# Altium PCB version_2.PcbDoc
Units mil, origin at the board's own origin, x right, y up, seen from the top; angles counter-clockwise.
Board outline 3930.36 x 2285 mil, 2 copper layers (Top Layer, Bottom Layer); 63 components, 60 nets, 290 pads, 52 vias.
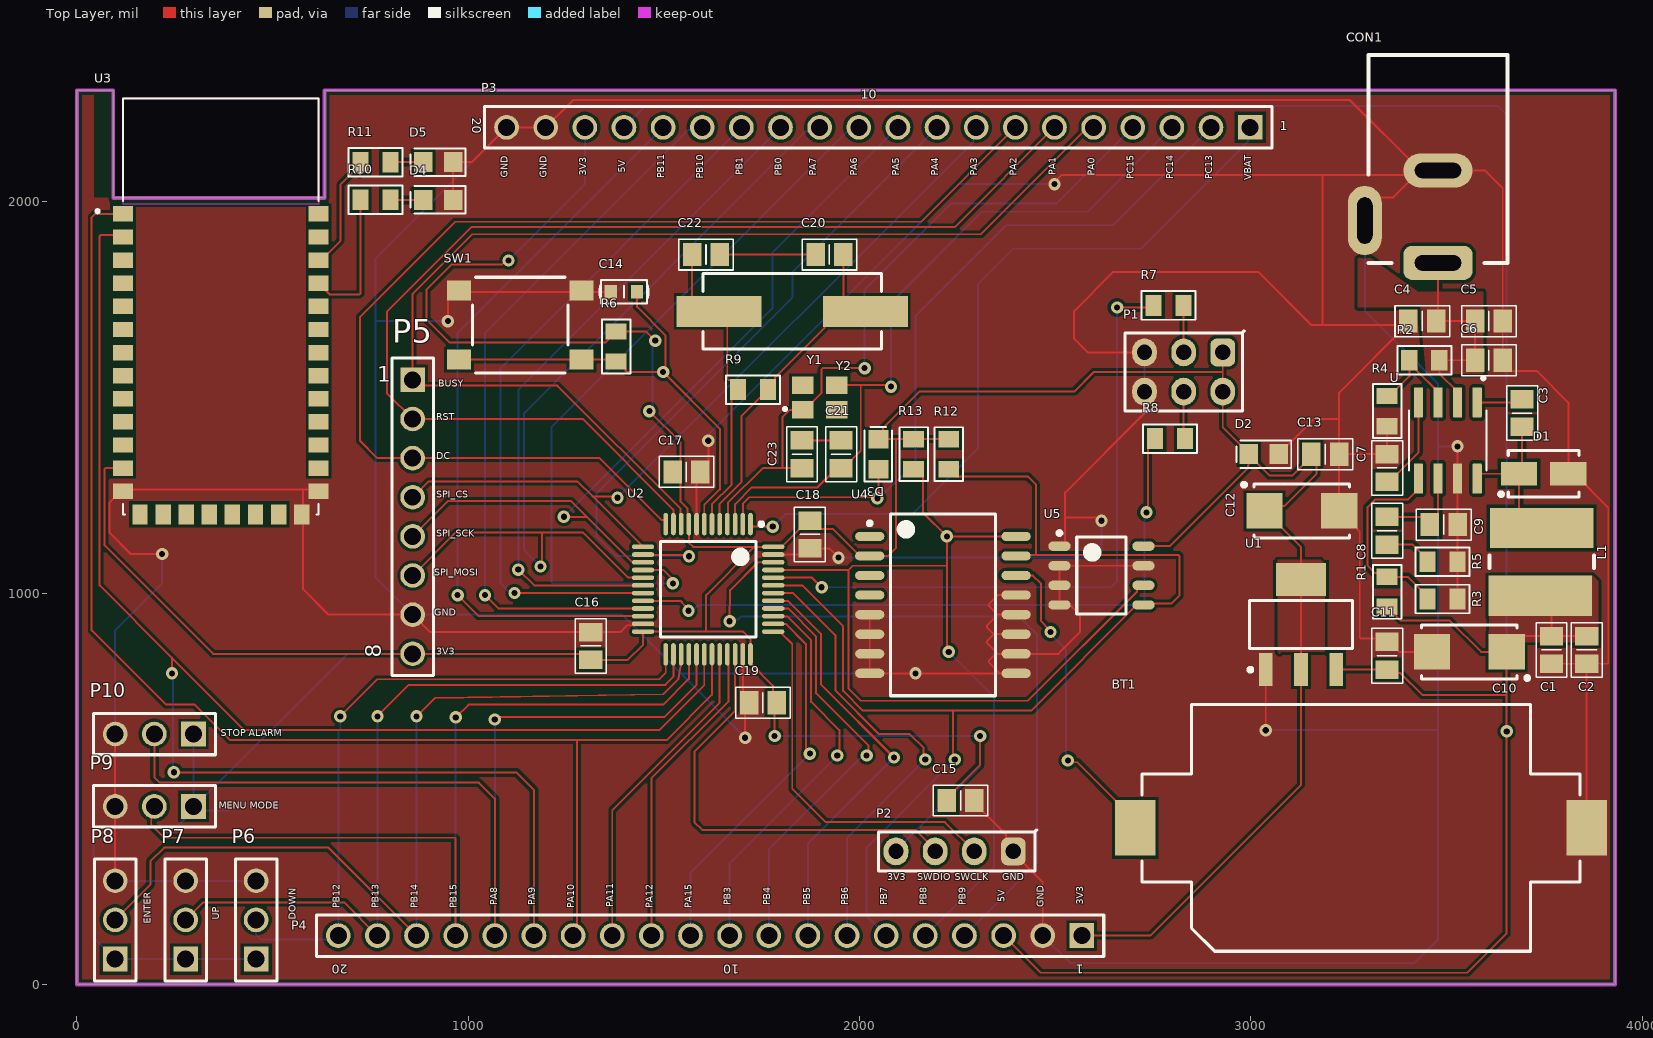
[diagram p0: Top Layer view]
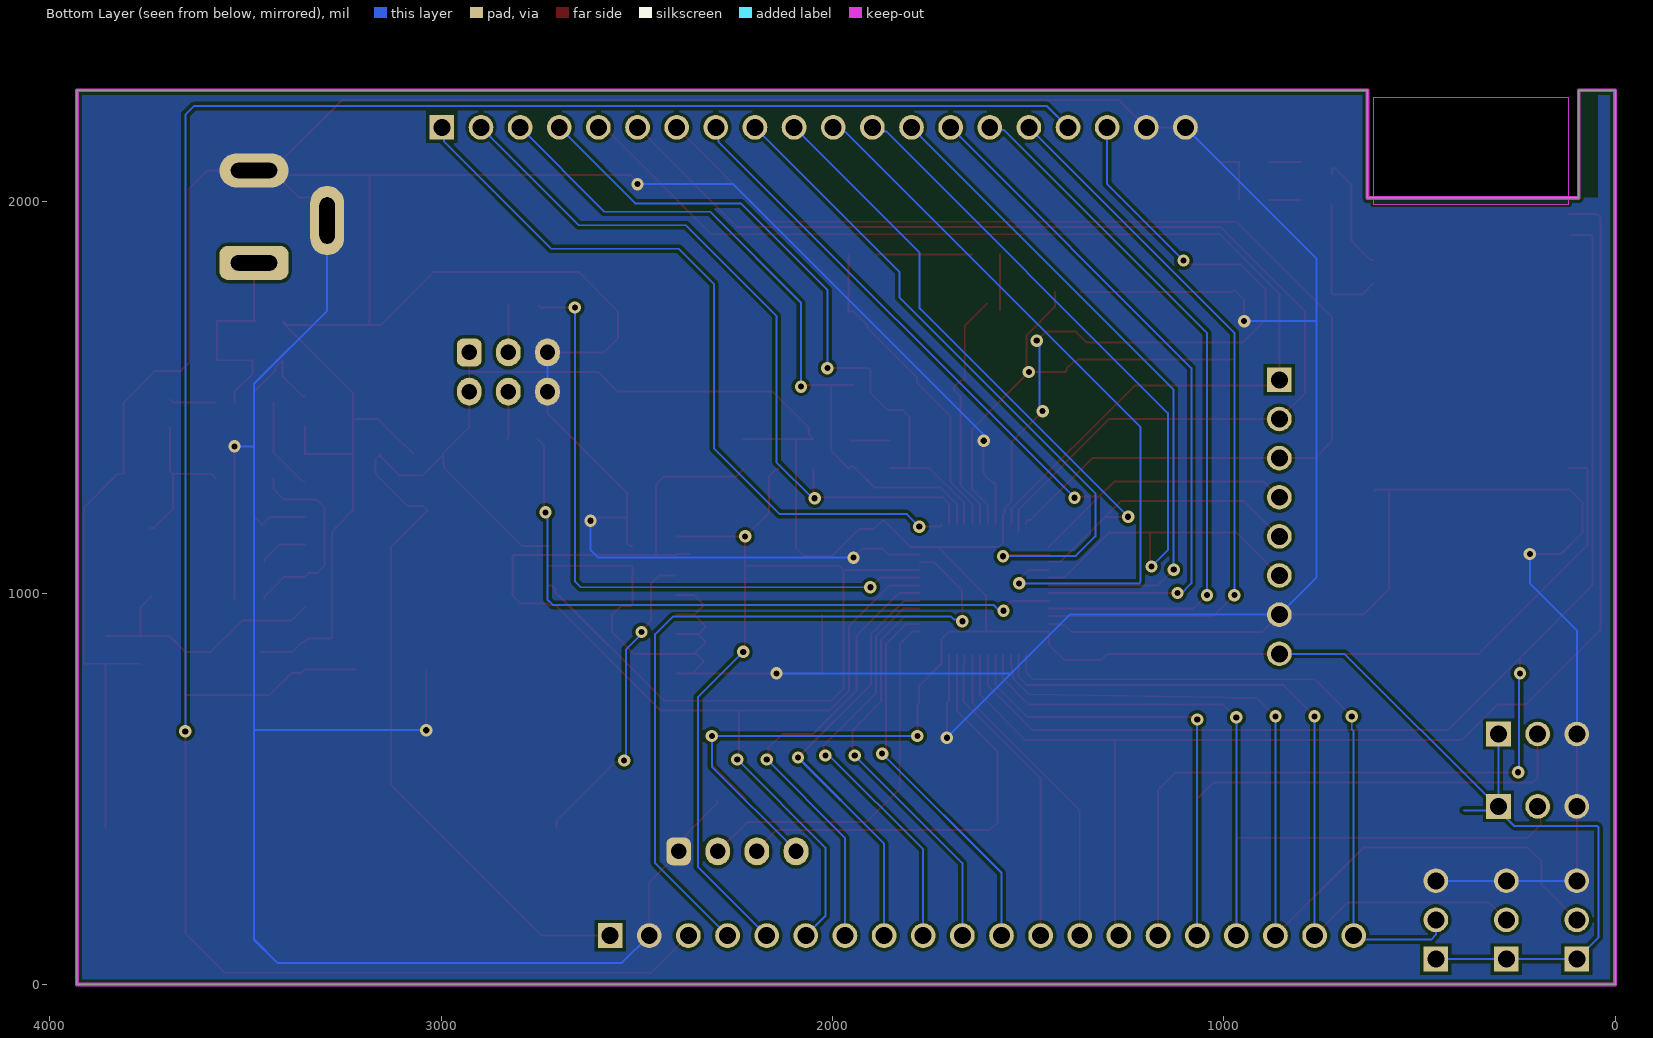
[diagram p1: Bottom Layer view, seen from below]

## Layer stack, top to bottom
Top Solder: solder mask 0.4, Solder Resist, Dk 3.5
Top Layer: signal copper 1.4
Dielectric 1: dielectric 12.6, FR-4, Dk 4.8
Bottom Layer: signal copper 1.4
Bottom Solder: solder mask 0.4, Solder Resist, Dk 3.5

## Board outline
0,0 0,2285 92.86,2285 92.86,2010 632.86,2010 632.86,2285 3930.36,2285 3930.36,0

## Design rules (kind name [scope] priority, off if disabled: settings)
Clearance [All] p1: gap=8 ignorepadtopadclearanceinfootprint=TRUE
PolygonConnect [All] p1: connectstyle=Direct reliefconductorwidth=10 reliefentries=4 polygonreliefangle="90 Angle" airgapwidth=10
RoutingVias [All] p1: holewidth=15.75 width=31.5 viastyle="Through Hole" minholewidth=15.75 minwidth=31.5 maxholewidth=15.75 maxwidth=31.5
SolderMaskExpansion [All] p1: expansion=4 istentingtop=FALSE
Width [All] p1: maxlimit=50 minlimit=5 preferedwidth=10
30 further rules are at their usual default settings.

## Classes and differential pairs
component class 06_I2C_DS3231: BT1 R12 R13 U4 U5
component class 05_Uart_Bluetooth: D4 D5 P5 P6 P7 P8 P9 P10 R10 R11 U3
component class 04: C14 C15 C16 C17 C18 C19 C20 C21 C22 C23 D2 D3 P1 P2 P3 P4 R6 R7 R8 R9 SW1 U2 Y1 Y2
component class 03_Power_supply: C1 C2 C3 C4 C5 C6 C7 C8 C9 C10 C11 C12 C13 CON1 D1 L1 R1 R2 R3 R4 R5 U U1

## Components (designator, comment, footprint, x,y, rotation, side; value= is the part's Value field where it differs from the comment)
BT1 "79527141" 79527141 3281.09,400 r180 top
C1 "47uF" "C 0805" 3767.86,855 r90 top
C2 "47uF" "C 0805" 3857.86,855 r90 top
C3 "0.1uF" "C 0805" 3692.86,1460 r90 top
C4 "10uf" "C 0805" 3437.86,1695 r0 top
C5 "10uf" "C 0805" 3607.86,1695 r180 top
C6 "0.01uF" "C 0805" 3607.86,1595 r180 top
C7 "0.01uF" "C 0805" 3347.86,1320 r270 top
C8 "1000pF" "C 0805" 3347.86,1159.57 r90 top
C9 "47pF" "C 0805" 3492.43,1175 r180 top
C10 "22uF" "C SMD TAN 2312 (C)" 3557.86,850 r180 top
C11 "100nF" "C 0805" 3347.86,840 r270 top
C12 "22uF" "C SMD TAN 2312 (C)" 3129.83,1210 r0 top
C13 "100nF" "C 0805" 3189.87,1355 r180 top
C14 "C" "C 0603" 1397.86,1770 r180 top
C15 "104" "C 0805" 2257.86,470 r0 top
C16 "104" "C 0805" 1312.86,865 r270 top
C17 "104" "C 0805" 1557.43,1310 r180 top
C18 "104" "C 0805" 1872.86,1150 r90 top
C19 "104" "C 0805" 1752.86,720 r0 top
C20 "20p" "C 0805" 1922.86,1865 r180 top
C21 "20p" "C 0805" 1952.86,1355 r90 top
C22 "20p" "C 0805" 1607.43,1865 r0 top
C23 "20p" "C 0805" 1852.86,1355 r90 top
CON1 "CON DC PWR" CONN/DC/PWR/5.0MM 3477.86,1843.78 r270 top
D1 "SS54F" "DO-214AC (SMA)" 3747.86,1305 r180 top
D2 "Led" "Led 0805" 3032.86,1355 r0 top
D3 "Led" "Led 0805" 2047.86,1355 r270 top
D4 "Led" "Led 0805" 922.86,2005 r0 top
D5 "Led" "Led 0805" 922.86,2101.22 r0 top
L1 "10uh" "Inductor SMD CDRH3D67" 3742.86,1080 r270 top
P1 "Header 3X2" HDR/Header/6/DL 2827.86,1565 r180 top
P2 "Header 4" HDR/Header/4 2242.86,340 r180 top
P3 "3A, 250 V (AC)" 61302011121 2047.86,2190 r180 top
P4 "3A, 250 V (AC)" 61302011121 1617.86,125 r180 top
P5 "3A, 250 V (AC)" 61300811121 857.86,1195 r270 top
P6 "3A, 250 V (AC)" 61300311121 457.86,165 r90 top
P7 "3A, 250 V (AC)" 61300311121 277.86,165 r90 top
P8 "3A, 250 V (AC)" 61300311121 97.86,165 r90 top
P9 "3A, 250 V (AC)" 61300311121 197.86,455 r180 top
P10 "3A, 250 V (AC)" 61300311121 197.86,640 r180 top
R1 "8.2k" "R 0805" 3347.86,1003.39 r270 top
R2 "100k" "R 0805" 3442.86,1595 r0 top
R3 "1.6k" "R 0805" 3489.48,985 r180 top
R4 "20k" "R 0805" 3347.86,1465 r90 top
R5 "30k" "R 0805" 3489.48,1080 r180 top
R6 "10k" "R 0805" 1377.86,1630 r270 top
R7 "100k" "R 0805" 2789.48,1735 r180 top
R8 "R" "R 0805" 2792.86,1395 r0 top
R9 "R" "R 0805" 1727.86,1520 r0 top
R10 "470" "R 0805" 762.86,2005 r180 top
R11 "470" "R 0805" 762.86,2101.22 r180 top
R12 "10k" "R 0805" 2227.86,1355 r270 top
R13 "4.7k" "R 0805" 2137.86,1355 r270 top
SW1 "430152043826" WS-TASV_L6W6H4.3_4301x20438x6 1132.86,1685 r0 top
U "TPS54231D" SOIC127P599X175-8N 3502.86,1390 r270 top
U1 "AMS1117-3.3V, 1A" "AMS1117-3.3V SOT223" 3127.86,919.92 r90 top
U2 "STM32F103C8T6" STM32F103C8T6 1612.86,1010 r270 top
U3 "HC-05" XCVR_HC-05 367.86,1720 r0 top
U4 "DS3231SN" DS3231SN-16SOIC 2212.86,970 r0 top
U5 "AT24C512C-SSHD-T" M24M01-RMN6TP 2617.86,1045 r0 top
Y1 "32MHz" WE-XTAL_CFPX-180 1897.86,1500 r0 top
Y2 "8MHz" WE-XTAL_HC49/4HSMX 1827.86,1720 r0 top

## Footprints (in the part's own frame and the unit in brackets; to place one, negate y for a bottom-side part, rotate by r counter-clockwise, add the part's x,y. Pads: shape width x height; smd on the part's side, far side on the other; paste and mask are expansions set on the pad)
79527141 [mm] "Battery Holder"
  rect 2.6x3.6 smd: 1(14.65,0) 2(-14.65,0)
  silkscreen extent -14.2,-8 14.2,8, body extent -15.95,-8 15.95,8, height 5.66
61300311121 [mm] "Pin Header, pitch 2.54 mm, THT, Vertical, single row, 3p"
  rect 1.6x1.6 hole 1.1: 1(-2.54,0)
  round 1.6 hole 1.1: 2(0,0) 3(2.54,0)
  silkscreen extent -3.96,-1.35 3.96,1.35, body extent -3.81,-1.27 3.81,1.27, height 8.57
61300811121 [mm] "Pin Header, pitch 2.54 mm, THT, Vertical, single row, 8p"
  rect 1.6x1.6 hole 1.1: 1(-8.89,0)
  round 1.6 hole 1.1: 2(-6.35,0) 3(-3.81,0) 4(-1.27,0) 5(1.27,0) 6(3.81,0) 7(6.35,0) 8(8.89,0)
  silkscreen extent -10.31,-1.35 10.31,1.35, body extent -10.16,-1.27 10.16,1.27, height 8.57
61302011121 [mm] "Pin Header, pitch 2.54 mm, THT, Vertical, single row, 20p"
  rect 1.6x1.6 hole 1.1: 1(-24.13,0)
  round 1.6 hole 1.1: 2(-21.59,0) 3(-19.05,0) 4(-16.51,0) 5(-13.97,0) 6(-11.43,0) 7(-8.89,0) 8(-6.35,0) 9(-3.81,0) 10(-1.27,0) 11(1.27,0) 12(3.81,0) 13(6.35,0) 14(8.89,0) 15(11.43,0) 16(13.97,0) 17(16.51,0) 18(19.05,0) 19(21.59,0) 20(24.13,0)
  silkscreen extent -25.55,-1.35 25.55,1.35, body extent -25.4,-1.27 25.4,1.27, height 8.57
"AMS1117-3.3V SOT223" [mm] "SOT223, 4-Leads, Body 6.51x7.00mm, Pitch 2.29mm"
  rect 2.15x0.9 smd: 1(-2.93,2.29) 2(-2.93,0) 3(-2.93,-2.29)
  rect 2.15x3.25 smd: 4(2.93,0)
  silkscreen extent -3.05,-3.35 1.55,3.41, body extent -3.5,-3.35 3.5,3.35, height 1.8
"C 0603" [mm] "Chip Capacitor, 2-Leads, Body 1.6x0.8mm, IPC Medium Density"
  rect 0.8x0.85 smd: 1(-0.85,0) 2(0.85,0)
  silkscreen extent -1.6,-0.75 1.6,0.75, body extent -0.8,-0.43 0.8,0.43, height 0.81
"C 0805" [mm] "Chip Capacitor, 2-Leads, Body 2.0x1.3mm, IPC Medium Density"
  rect 1.2x1.5 smd: 1(-0.9,0) 2(0.9,0)
  silkscreen extent -1.78,-1 1.78,1, body extent -1,-0.64 1,0.61, height 0.6
"C SMD TAN 2312 (C)" [mm] "Molded Capacitor, 2-Leads, Body 6.0x3.2mm, IPC Medium Density"
  rect 2.35x2.3 smd: 1(-2.425,0) 2(2.425,0)
  silkscreen extent -3.88,-1.75 3.1,1.82, body extent -3.09,-1.58 3.09,1.63, height 2.68
CONN/DC/PWR/5.0MM [mm]
  rrect50% 2.2x4.5 hole 1 slot 3 at 90 deg: 1(0,0)
  oval 2.2x4.5 hole 1 slot 3 at 90 deg: 2(-6,0)
  oval 4.5x2.2 hole 1 slot 3 at 0 deg: 3(-2.75,-4.75)
  silkscreen extent -13.5,-4.5 0,4.5, body extent -13.58,-5 0.25,4.5, height 11.02
"DO-214AC (SMA)" [mm] "Molded Diode, 2-Leads, Body 4.3x2.7mm, IPC Medium Density"
  rect 2.35x1.55 smd: 1(-1.6,0) 2(1.6,0)
  silkscreen extent -2.3,-1.5 2.89,1.5, body extent -2.6,-1.3 2.6,1.3, height 2.4
DS3231SN-16SOIC [mm] "SOIC, 16-Leads, Body 11.55x7.50mm, Pitch 1.27mm, IPC Medium Density"
  oval 1.9x0.6 smd: 1(-4.75,4.445) 2(-4.75,3.175) 3(-4.75,1.905) 4(-4.75,0.635) 5(-4.75,-0.635) 6(-4.75,-1.905) 7(-4.75,-3.175) 8(-4.75,-4.445) 9(4.75,-4.445) 10(4.75,-3.175) 11(4.75,-1.905) 12(4.75,-0.635) 13(4.75,0.635) 14(4.75,1.905) 15(4.75,3.175) 16(4.75,4.445)
  silkscreen extent -4.87,-5.9 3.4,5.9, body extent -5.16,-5.9 5.16,5.9, height 2.65
HDR/Header/4 [mm]
  rrect50% 1.6x1.8 hole 1: 1(-3.81,0)
  oval 1.6x1.8 hole 1: 2(-1.27,0) 3(1.27,0) 4(3.81,0)
  silkscreen extent -5.33,-1.4 4.95,1.27, body extent -5.08,-1.27 5.08,1.27, height 8.89
HDR/Header/6/DL [mm]
  rrect50% 1.6x1.8 hole 1: 1(-2.54,-1.27)
  oval 1.6x1.8 hole 1: 2(-2.54,1.27) 3(0,-1.27) 4(0,1.27) 5(2.54,-1.27) 6(2.54,1.27)
  silkscreen extent -3.94,-2.67 3.81,2.54, body extent -3.81,-2.54 3.81,2.54, height 8.89
"Inductor SMD CDRH3D67" [mm] "Precision Wire Wound Inductor, 2-Leads, Body 10.0x8.0mm, IPC Low Density"
  rect 2.6x6.7 smd: 1(-2.2,0) 2(2.2,-0.1)
  silkscreen extent -0.4,-3.4 0.4,3.4, body extent -3.35,-3.35 3.35,3.35, height 2.9
"Led 0805" [mm] "Led SMD 0805"
  rect 1.2x1.3 smd: 1(-0.975,0) 2(0.975,0)
  silkscreen extent -1.78,-0.89 1.78,0.89, body extent -1.01,-0.64 1.01,0.61, height 1.1
M24M01-RMN6TP [mm] "SOIC, 8-Leads, Body 4.90x3.90mm, Pitch 1.27mm, IPC Medium Density"
  oval 1.45x0.6 smd: 1(-2.725,1.905) 2(-2.725,0.635) 3(-2.725,-0.635) 4(-2.725,-1.905) 5(2.725,-1.905) 6(2.725,-0.635) 7(2.725,0.635) 8(2.725,1.905)
  silkscreen extent -2.85,-2.5 1.6,2.88, body extent -3,-2.5 3,2.5, height 1.25
"R 0805" [mm] "Chip Resistor, 2-Leads, Body 2.0x1.3mm, IPC Medium Density"
  rect 1.05x1.35 smd: 1(-0.975,0) 2(0.975,0)
  silkscreen extent -1.75,-0.92 1.75,0.92, body extent -1,-0.61 1,0.59, height 0.5
SOIC127P599X175-8N [mm]
  rrect25% 1.97x0.6 smd: 1(-2.47,1.905) 2(-2.47,0.635) 3(-2.47,-0.635) 4(-2.47,-1.905) 5(2.47,-1.905) 6(2.47,-0.635) 7(2.47,0.635) 8(2.47,1.905)
  silkscreen extent -4.14,-2.52 1.95,2.52
STM32F103C8T6 [mm] "TSQFP, 48-Leads, Body 7.00x7.00mm, Pitch 0.50mm, IPC Medium Density"
  oval 1.45x0.3 smd: 1(-4.225,2.75) 2(-4.225,2.25) 3(-4.225,1.75) 4(-4.225,1.25) 5(-4.225,0.75) 6(-4.225,0.25) 7(-4.225,-0.25) 8(-4.225,-0.75) 9(-4.225,-1.25) 10(-4.225,-1.75) 11(-4.225,-2.25) 12(-4.225,-2.75) 25(4.225,-2.75) 26(4.225,-2.25) 27(4.225,-1.75) 28(4.225,-1.25) 29(4.225,-0.75) 30(4.225,-0.25) 31(4.225,0.25) 32(4.225,0.75) 33(4.225,1.25) 34(4.225,1.75) 35(4.225,2.25) 36(4.225,2.75)
  oval 0.3x1.45 smd: 13(-2.75,-4.225) 14(-2.25,-4.225) 15(-1.75,-4.225) 16(-1.25,-4.225) 17(-0.75,-4.225) 18(-0.25,-4.225) 19(0.25,-4.225) 20(0.75,-4.225) 21(1.25,-4.225) 22(1.75,-4.225) 23(2.25,-4.225) 24(2.75,-4.225) 37(2.75,4.225) 38(2.25,4.225) 39(1.75,4.225) 40(1.25,4.225) 41(0.75,4.225) 42(0.25,4.225) 43(-0.25,4.225) 44(-0.75,4.225) 45(-1.25,4.225) 46(-1.75,4.225) 47(-2.25,4.225) 48(-2.75,4.225)
  silkscreen extent -4.35,-3.1 3.1,3.58, body extent -4.5,-4.5 4.5,4.5, height 1.6
WE-XTAL_CFPX-180 [mm] "Quartz Crystal, size CFPX-180, body 3.4x2.7mm"
  rect 1.4x1.15 smd: 1(-1.1,-0.8) 2(1.1,-0.8) 3(1.1,0.8) 4(-1.1,0.8)
  silkscreen extent -2.35,-0.85 -2.15,-0.65, body extent -1.7,-1.35 1.7,1.35, height 0.65
WE-XTAL_HC49/4HSMX [mm] "Quartz Crystal, size HC49/4HSMX, body 11.4x4.9mm"
  rect 5.5x2 smd: 1(-4.75,0) 2(4.75,0)
  silkscreen extent -5.8,-2.45 5.8,2.45, body extent -6.7,-2.45 6.7,2.45, height 4.3
WS-TASV_L6W6H4.3_4301x20438x6 [mm] "SMD Tact Switch, body 6x6mm"
  rect 1.55x1.3 smd: A1(-3.975,2.25) A2(3.975,2.25) B1(-3.975,-2.25) B2(3.975,-2.25)
  silkscreen extent -3.1,-3.1 3.1,3.1, body extent -4.5,-3.1 4.5,3.1, height 4.3
XCVR_HC-05 [mm]
  rect 1.3x1 smd: 1(-6.35,6.325) 2(-6.35,4.825) 3(-6.35,3.325) 4(-6.35,1.825) 5(-6.35,0.325) 6(-6.35,-1.175) 7(-6.35,-2.675) 8(-6.35,-4.175) 9(-6.35,-5.675) 10(-6.35,-7.175) 11(-6.35,-8.675) 12(-6.35,-10.175) 13(-6.35,-11.675) 22(6.35,-11.675) 23(6.35,-10.175) 24(6.35,-8.675) 25(6.35,-7.175) 26(6.35,-5.675) 27(6.35,-4.175) 28(6.35,-2.675) 29(6.35,-1.175) 30(6.35,0.325) 31(6.35,1.825) 32(6.35,3.325) 33(6.35,4.825) 34(6.35,6.325)
  rect 1x1.3 smd: 14(-5.25,-13.175) 15(-3.75,-13.175) 16(-2.25,-13.175) 17(-0.75,-13.175) 18(0.75,-13.175) 19(2.25,-13.175) 20(3.75,-13.175) 21(5.25,-13.175)
  Keep-Out Layer region: 6.35,6.95 -6.35,6.95 -6.35,13.85 6.35,13.85
  Keep-Out Layer region: 6.35,6.95 -6.35,6.95 -6.35,13.85 6.35,13.85
  silkscreen extent -8.1,-13.18 6.35,13.82

## Part data
BT1: "WA-BCPH Battery Holder, SMT, battery type 2032", Manufacturer="Wurth Elektronik", Operating Temperature Max=105°C, Operating Temperature Min=-40°C, Battery Type=2032, Category="Battery Holders", ComponentLink1Description="Website Link", ComponentLink1URL=https://www.we-online.com/redexpert/article/79527141?ad, ComponentLink2Description="Datasheet Link", ComponentLink2URL=https://www.we-online.com/redexpert/spec/79527141?ad, Manufacturer Part Number=79527141, Match Code=WA-BCPH, Mount="Surface Mount", Packaging="Tape and Reel"
C1 C2 C3 C4 C5 C6 C7 C8 C9 C11 C13 C14 C15 C16 C17 C18 C19 C20 C21 C22 C23: library part "Capacitor NP", "Capacitor non-pol"
C10 C12: library part Capacitor, "Capacitor pol"
CON1: "DC input connector"
D1: library part "Diode Schottky", "Schottky Diode"
D2 D3 D4 D5: "Typical LED"
L1: library part Inductor, "Inductor"
P1: "Header, 3-Pin, Dual row"
P2: "Header, 4-Pin"
P3 P4: library part 61302011121, "WR-PHD Pin Header, THT, pitch 2.54mm, Single Row, Vertical, 20p", Contact Resistance=20mOhm, LCSC Part #=N/A, Manufacturer="Wurth Elektronik", Operating Temperature Max="+ 85 C", Operating Temperature Min="- 25 C", Rated Current=3A, Supplier 1 Part Number=710-61302011121, Withstanding Voltage=500VAC, Working Voltage=250VAC, ComponentLink1Description=Datasheet, ComponentLink1URL=https://www.we-online.com/catalog/datasheet/61302011121.pdf, Gender="Pin Header", Manufacturer Part Number=61302011121, Mount=THT, Orientation=Vertical, Packaging=Bag, Pin Number=20, Pitch=2.54mm, Published Date="May 2020", Row Number=Single, Supplier 1=Mouser, Supplier 1 URL=https://www.mouser.vn/ProductDetail/Wurth-Elektronik/61302011121?qs=PhR8RmCirEbj%2FFsnpbhNaw%3D%3D, Supplier 2=Digi-Key, Supplier 2 Part Number=N/A, Supplier 2 URL=N/A, Supplier 3=thegioiic, Supplier 3 Part Number=N/A, Supplier 3 URL=N/A
P5: library part 61300811121, "WR-PHD Pin Header, THT, pitch 2.54mm, Single Row, Vertical, 8p", Contact Resistance=20mOhm, LCSC Part #=N/A, Manufacturer="Wurth Elektronik", Operating Temperature Max="+ 85 C", Operating Temperature Min="- 25 C", Rated Current=3A, Supplier 1 Part Number=710-61300811121, Withstanding Voltage=500VAC, Working Voltage=250VAC, ComponentLink1Description=Datasheet, ComponentLink1URL=https://www.we-online.com/catalog/datasheet/61300811121.pdf, Gender="Pin Header", Manufacturer Part Number=61300811121, Mount=THT, Orientation=Vertical, Packaging=Bag, Pin Number=8, Pitch=2.54mm, Published Date="May 2020", Row Number=Single, Supplier 1=Mouser, Supplier 1 URL=https://www.mouser.vn/ProductDetail/Wurth-Elektronik/61300811121?qs=PhR8RmCirEZRdx%252BVlEmRRA%3D%3D, Supplier 2=Digi-Key, Supplier 2 Part Number=N/A, Supplier 2 URL=N/A, Supplier 3=thegioiic, Supplier 3 Part Number=N/A, Supplier 3 URL=N/A
P6 P7 P8 P9 P10: library part 61300311121, "WR-PHD Pin Header, THT, pitch 2.54mm, Single Row, Vertical, 3p", Contact Resistance=20mOhm, LCSC Part #=C2937625, Manufacturer="Wurth Elektronik", Operating Temperature Max="+ 85 C", Operating Temperature Min="- 25 C", Rated Current=3A, Supplier 1 Part Number=710-61300311121, Supplier 2 Part Number=N/A, Withstanding Voltage=500VAC, Working Voltage=250VAC, ComponentLink1Description=Datasheet, ComponentLink1URL=https://www.we-online.com/catalog/datasheet/61300311121.pdf, Gender="Pin Header", Manufacturer Part Number=61300311121, Mount=THT, Orientation=Vertical, Packaging=Bag, Pin Number=3, Pitch=2.54mm, Published Date="May 2020", Row Number=Single, Supplier 1=Mouser, Supplier 1 URL=https://www.mouser.vn/ProductDetail/Wurth-Elektronik/61300311121?qs=PhR8RmCirEYxRWFJzNKsUw%3D%3D, Supplier 2=Digi-Key, Supplier 2 URL=N/A, Supplier 3=thegioiic, Supplier 3 Part Number=N/A, Supplier 3 URL=N/A
R1 R2 R3 R4 R5 R6 R7 R8 R9 R10 R11 R12 R13: library part Resistor, "Resistor"
SW1: "WS-TASV SMT Tact Switch, L6 x W6 x H4.3mm, 260g, SPST-NO, 12V, 50mA", LCSC Part #=N/A, Manufacturer="Wurth Elektronik", Operating Temperature Max=85°C, Operating Temperature Min=-40°C, Package / Case=0805, Rated Current=50mA, Rated Voltage=12VDC, Supplier 1 Part Number=710-430152043826, Supplier 2 Part Number=732-6991-2-ND, Supplier 3 Part Number=OEM, Category="Tact Switches", Circuit=SPST-NO, ComponentLink1Description=Datasheet, ComponentLink1URL=https://www.we-online.com/redexpert/spec/430152043826?ad, Contact Material="Stainless Steel", Height=4.3mm, Length=6mm, Manufacturer Part Number=430152043826, Match Code=WS-TASV, Mount="Surface Mount", Operation Force=260g, Packaging="Tape and Reel", Supplier 1=Mouser, Supplier 1 URL=https://www.mouser.vn/ProductDetail/Wurth-Elektronik/430152043826?qs=wr8lucFkNMUjBcFj1giTsA%3D%3D, Supplier 2=Digi-Key, Supplier 2 URL=https://www.digikey.com/en/products/detail/w%C3%BCrth-elektronik/430152043826/5208994, Supplier 3=thegioiic, Supplier 3 URL=https://www.thegioiic.com/nut-nhan-6x6mm-cao-4-3mm-4-chan-smd, Terminal Material="Copper Alloy", Terminal Plating=Silver, Washable=No, Width=6mm
U: "å…·æœ‰Eco-modeï¼†tradeçš„3.5è‡³28Vè¾“å…¥ï¼Œ2Aï¼Œ570kHzé™åŽ‹è½¬æ¢å™¨ï¼›8-SOIC -40è‡³150", PACKAGE="SOIC-8 Texas Instruments", Availability=Unavailable, DigiKey-Purchase-URL=https://snapeda.com/shop?store=DigiKey&id=456068, MF="Texas Instruments", MP=TPS54231D, Price=None, SnapEDA_Link=https://www.snapeda.com/parts/TPS54231D/Texas%20Instruments/view-part/456068/?ref=snap, Texas_Instruments-Purchase-URL=https://snapeda.com/shop?store=Texas+Instruments&id=456068
U1: library part AMS1117-3.3V, "1A 60dB@(120Hz) Fixed 3.3V Positive electrode 12V SOT-223 Linear Voltage Regulators (LDO) ROHS", Current Input Maximum=N/A, Current Output Maximum=1A, LCSC Part #=C347222, Manufacturer=AMS, Operating Temperature Max="+ 85 C", Operating Temperature Min="- 40 C", Voltage Input Maximum=15V, Voltage Output=3.3V, ComponentLink1Description=Datasheet, ComponentLink1URL=http://www.advanced-monolithic.com/pdf/ds1117.pdf, Manufacturer Part Number=N/A, Mount=SMD/SMT, Packaging="Tape and Reel", Pad Count=4, Supplier 1=Mouser, Supplier 1 Part Number=N/A, Supplier 1 URL=N/A, Supplier 2=Digi-Key, Supplier 2 Part Number=N/A, Supplier 2 URL=N/A, Supplier 3=thegioiic, Supplier 3 Part Number=N/A, Supplier 3 URL=https://www.thegioiic.com/ams1117-3-3v-ic-on-ap-3-3v-1a-sot-223
U2: "ARM Microcontrollers - MCU 32BIT Cortex M3 64KB 20KB RAM 2X12 ADC", LCSC Part #=C8734, Manufacturer=STMicroelectronics, Manufacturer Part Number=STM32F103C8T6TR, Operating Temperature Max="+ 85 C", Operating Temperature Min="- 40 C", Package / Case=LQFP48, Supplier 1 Part Number=511-STM32F103C8T6, Supplier 2 Part Number=497-17666-2-ND, Supply Voltage - Max="3.6 V", Supply Voltage - Min="2 V", ComponentLink1Description=Datasheet, ComponentLink1URL=https://www.mouser.com/datasheet/2/389/stm32f103c8-1851025.pdf, Mount=SMD/SMT, Packaging="Tape and Reel", Pad Count=48, Part Number=STM32F103C8T6, Supplier 1=Mouser, Supplier 1 URL=https://www.mouser.com/ProductDetail/STMicroelectronics/STM32F103C8T6?qs=bhCVus9SdFtq6kqxsU5%2FDA%3D%3D, Supplier 2=Digi-Key, Supplier 2 URL=https://www.digikey.com/en/products/detail/stmicroelectronics/stm32f103c8t6tr/2122442, Supplier 3=thegioiic, Supplier 3 Part Number=STM32F103C8T6, Supplier 3 URL=https://www.thegioiic.com/stm32f103c8t6-32-bit-arm-cortex-m3-microcontroller-72mhz-64kb-flash-48-lqfp
U3: "Bluetooth to Serial Port Module", PACKAGE=None, Availability=Unavailable, MP=HC-05, Price=None
U4: library part DS3231SN-16SOIC, "IC RTC CLK/CALENDAR I2C 16SOIC", LCSC Part #=N/A, Manufacturer="Analog Devices Inc./Maxim Integrated", Operating Supply Current="110 - 170 (µA)", Operating Temperature Max="+ 85 C", Operating Temperature Min="- 40 C", Package / Case=SOIC-16, Supplier 1 Part Number=700-DS3231SN-, Supplier 2 Part Number=DS3231SN#-ND, Supply Voltage - Max="5.5 V", Supply Voltage - Min="2.3 V", ComponentLink1Description=Datasheet, ComponentLink1URL=https://www.analog.com/media/en/technical-documentation/data-sheets/DS3231.pdf, Manufacturer Part Number=DS3231SN, Mount=SMD/SMT, Packaging="Tape and Reel", RTC Bus Interface="I2C, Serial", RTC Memory Size=N/A, Supplier 1=Mouser, Supplier 1 URL=https://www.mouser.com/ProductDetail/Analog-Devices-Maxim-Integrated/DS3231SN?qs=ffX8NcjNb2RmKAb9wAk9Ug%3D%3D, Supplier 2=Digi-Key, Supplier 2 URL=https://www.digikey.com/en/products/detail/analog-devices-inc-maxim-integrated/DS3231SN/1197576, Supplier 3=thegioiic, Supplier 3 Part Number=N/A, Supplier 3 URL=https://www.thegioiic.com/ds3231sn-ic-rtc-clock-calendar-16-soic, Time Format="HH:MM:SS (12 hr, 24 hr)"
U5: "EEPROM SERIAL EEPROM 512K (64K X 8) 2WIRE 2.5V", LCSC Part #=C12371, Manufacturer=Microchip, Maximum Clock Frequency="1 MHz", Operating Temperature Max="+ 85 C", Operating Temperature Min="- 40 C", Package / Case=SOIC-8, Supplier 1 Part Number=556-AT24C512C-SSHD-T, Supplier 2 Part Number=AT24C512C-SSHD-TTR-ND, Supply Voltage - Max="5.5 V", Supply Voltage - Min="2.5 V", ComponentLink1Description=Datasheet, ComponentLink1URL=https://www.mouser.vn/datasheet/2/268/AT24C512C_I_c2_b2C_Compatible__Two_Wire__Serial_EE-2306430.pdf, Interface Type="2-Wire, I2C", Manufacturer Part Number=AT24C512C-SSHD-T, Memory Size="512 kbit", Mount=SMD/SMT, Packaging="Tape and Reel", Supplier 1=Mouser, Supplier 1 URL=https://www.mouser.vn/ProductDetail/Microchip-Technology/AT24C512C-SSHD-T?qs=Oaf4mloV4cM7Q6xetGfOtg%3D%3D, Supplier 2=Digi-Key, Supplier 2 URL=https://www.digikey.com/en/products/detail/microchip-technology/at24c512c-sshd-t/3046245, Supplier 3=thegioiic, Supplier 3 Part Number=AT24C512C-SSHD-T, Supplier 3 URL=https://www.thegioiic.com/at24c512c-sshd-t-ic-eeprom-512kbit-8-soic
Y1: library part 073525326010, "WE-XTAL Quartz Crystal, SMT, CFPX-180, 32MHz, +/-30ppm", Frequency Stability=+/-16ppm, Frequency Tolerance=+/-10ppm, LCSC Part #=N/A, Load Capacitance=9pF, Manufacturer=NDK, Manufacturer Part Number=NX3225SA-32MHZ-EXS00A-CS02368, Operating Temperature Max="+ 70 C", Operating Temperature Min="+ 20 C", Package / Case=CFPX-180/3525, Supplier 1 Part Number=344-NX3225SA32MHZEXS, Supplier 2 Part Number=644-1208-2-ND, ComponentLink1Description=Datasheet, ComponentLink1URL=https://www.mouser.com/datasheet/2/905/ndk_04232018_NX3225SA-32MHZ-EXS00A-CS02368-1324924.pdf, Frequency=32MHz, Mounting Technology=SMT, Packaging="Tape and Reel", Supplier 1=Mouser, Supplier 1 URL=https://www.mouser.com/ProductDetail/NDK/NX3225SA-32MHZ-EXS00A-CS02368?qs=55YtniHzbhCu90OOsHDzwg%3D%3D, Supplier 2=Digi-Key, Supplier 2 URL=https://www.digikey.com/en/products/detail/ndk-america-inc/nx3225sa-32mhz-exs00a-cs02368/3946316, Supplier 3=thegioiic, Supplier 3 Part Number=N/A, Supplier 3 URL=N/A
Y2: library part 071105086016, "WE-XTAL Quartz Crystal, SMT, HC49/4HSMX, 8MHz, +/-30ppm", Frequency Stability=+/-50ppm, Frequency Tolerance=+/-30ppm, Load Capacitance=16pF, Manufacturer="Wurth Elektronik", Manufacturer Part Number=830003151, Operating Temperature Max="+ 60 C", Operating Temperature Min="- 10 C", Package / Case=HC49/4HSMX, Supplier 1 Part Number=710-830003151, Supplier 2 Part Number=732-830003151TR-ND, Supplier 3 Part Number=N/A, ComponentLink1Description=Datasheet, ComponentLink1URL=https://katalog.we-online.com/pbs/datasheet/830003151.pdf, Frequency=8MHz, Mount=SMD/SMT, Packaging="Tape and Reel", Supplier 1=Mouser, Supplier 1 URL=https://www.mouser.com/ProductDetail/Wurth-Elektronik/830003151?qs=2WXlatMagcHisY7XHApyYg%3D%3D, Supplier 2=Digi-Key, Supplier 2 URL=https://www.digikey.com/en/products/detail/w%C3%BCrth-elektronik/830003151/13979296, Supplier 3=thegioiic, Supplier 3 URL=https://www.thegioiic.com/thach-anh-8mhz-2-chan-smd-hc49-s

## Via types
v1: diameter 31.5, hole 15.75, Top Layer to Bottom Layer, tented both sides, 52 vias

## Nets (pads, with @x,y where several pads share a name; then routed paths per layer and width w, separated by ;. In a path a pad name is that pad's centre, name@x,y a point inside that pad or via, vN(x,y) a via of type N, cw(c..) or ccw(c..) an arc to the next point about the centre after c; other vN are vias at no path point)
5V: C1.2 C2.2 C10.1 C11.2 L1.2 P3.17 P4.3 R1.2 U1.3 | length 7099.7
  Top Layer w5: P4.3 2462.86,30 3552.86,30 3653.34,130.47 v1(3653.34,646.76) 3653.34,740 ; U1.3 C11.2 3356.53,795.9 3381.96,795.9 3437.86,740 3653.34,740 ; R1.2 3382.86,930 3507.86,930 3587.86,850 C10.1@3652.35,850 ; L1.2 3767.86,964.45 C1.2 ; C2.2 C1.2 ; 3653.34,740 3653.34,780 C10.1 3693.77,890.43 C1.2
  Bottom Layer w5: P3.17 1452.86,2245 3630.88,2245 3653.34,2222.54 v1(3653.34,646.76)
BOOT0: R7.2 U2.44 | length 1690.3
  Top Layer w5: U2.44 1878.34,1039.53 v1(1902.86,1015) ; v1(2657.86,1730) 2746.09,1730 R7.2
  Bottom Layer w5: v1(1902.86,1015) 2642.86,1015 2657.86,1030 v1(2657.86,1730)
BOOT1: R8.1 U2.20 | length 1717.3
  Top Layer w5: U2.20 1446.76,980.24 1542.75,980.24 1545.67,977.31 v1(1562.86,955) ; 2736.31,1221.99 2736.31,1376.83 R8.1
  Bottom Layer w5: v1(1562.86,955) 1573.29,955 1588.29,970 2714.94,970 2727.86,982.93 2727.86,1200 2726.41,1198.54 2725.04,1198.54 v1(2732.86,1206.37)
GND: BT1.2 C1.1 C2.1 C4.1 C5.1 C6.1 C7.1 C9.1 C10.2 C11.1 C12.2 C13.1 C14.2 C15.2 C16.1 C17.1 C18.1 C19.1 CON1.2 CON1.3 D1.1 D2.2 D4.2 D5.2 P1.5 P1.6 P2.1 P3.19 P3.20 P4.2 P5.7 P6.3 P7.3 P8.3 P9.3 P10.3 R3.1 R4.1 R5.1 SW1.A1 SW1.A2 U1.1 U2.8 U2.23 U2.35 U2.47 U3.13 U3.21 U3.22 U4.5 U4.6 U4.7 U4.8 U4.9 U4.10 U4.11 U4.12 U4.13 U5.1 U5.2 U5.3 U5.4 U5.7 U.7 | length 25338
  Top Layer w5: P8.3 P9.3 P10.3 ; v1(217.86,1100) 137.86,1100 83.86,1154 83.86,1232.26 116.96,1265.35 574.94,1265.35 ; U3.22 612.86,1265.35 574.94,1265.35 ; v1(947.86,1695) 947.86,1745.08 948.36,1745.57 948.36,1750.49 971.45,1773.58 SW1.A1 979.95,1770 C14.2 ; D4.2 D5.2 1009.09,2101.22 P3.20 P3.19 1267.86,2260 3252.59,2260 CON1.2@3432.59,2080 ; U2.23 1422.05,921.42 1418.6,917.97 1405.84,917.97 1388.3,900.43 C16.1 902.43,900.43 P5.7 642.86,945 577.86,1010 577.86,1262.43 574.94,1265.35 ; U2.8 1583.34,1280.04 1586.42,1283.12 1592.18,1283.12 1613.3,1304.24 v1(1613.3,1389.57) ; U2.35 1701.45,725.98 1707.43,720 v1(1707.43,630.43) ; U2.47 1856.88,1098.58 C18.1 1922.22,1114.57 v1(1946.08,1090.71) ; U4.5 U4.6 U4.7 U4.8 v1(2142.86,795) 2357.86,795 ; C15.2 2293.3,464.09 2374.46,382.93 2374.46,358.41 P2.1 2392.86,336.06 2467.86,261.06 P4.2 ; U4.9 2357.86,795 ; U4.11 2342.86,895 ; U4.12 2352.86,945 ; U4.13 2352.86,995 2329.94,972.07 2329.94,967.93 2352.86,945 ; v1(2497.86,2045) 2497.86,2049.83 2516.64,2068.61 3182.86,2068.61 ; U5.1 2516.21,1120 2524.81,1128.6 2524.81,1192.78 ; v1(2617.86,1185) 2610.09,1192.78 2524.81,1192.78 ; U5.7 U5.2 U5.3 U5.4 2513.96,966.62 2541.24,966.62 2562.86,945 2562.86,900 2507.86,845 U4.10 2352.86,845 ; P1.6 2727.86,1460 2524.81,1256.95 2524.81,1192.78 ; P1.5 2582.86,1615 2547.86,1650 2547.86,1720.53 2647.33,1820 3019.59,1820 3154.59,1685 3182.86,1685 ; v1(3037.71,649.84) U1.1 ; D2.2 3071.25,1356.97 3092.37,1378.09 3094.34,1378.09 3161.25,1445 3225.31,1445 ; CON1.3 3290.86,1973.46 3328.56,2011.16 3363.75,2011.16 CON1.2@3421.2,2068.61 ; R4.1 C7.1 3347.43,1355 C13.1 ; C10.2 3379.2,850 3353.77,875.43 C11.1 3339.2,884.1 3280.79,884.1 3277.86,887.03 3277.86,1157.44 3269.07,1166.24 3269.07,1167.22 3226.29,1210 C12.2 C13.1 ; R3.1 R5.1 C9.1 U.7 v1(3527.86,1375) ; C1.1 C2.1 ; BT1.2 C2.1 ; 2342.86,895 2324.94,877.07 2324.94,872.93 2352.86,845 ; 2342.86,895 2324.94,912.93 2324.94,917.07 2352.86,945 ; 2352.86,845 2347.86,845 2329.94,827.07 2329.94,822.93 2357.86,795 ; 3182.86,1685 3392.43,1685 C4.1 3402.43,1689.09 3225.31,1511.97 3225.31,1445 ; 3182.86,1685 3182.86,2068.61 ; 3182.86,2068.61 CON1.2@3421.2,2068.61 ; C13.1 3225.31,1445 ; CON1.2@3421.2,2068.61 3466.48,2068.61 CON1.2 ; CON1.2@3421.2,2068.61 CON1.2@3432.59,2080 ; CON1.2@3432.59,2080 CON1.2 ; CON1.2 3597.86,2080 3643.3,2034.57 C5.1 C6.1 3643.3,1589.09 3664.42,1567.97 3729.89,1567.97 3810.86,1487.01 D1.1 3826.6,1305 3912.86,1218.74 3912.86,822.5 3909.94,819.57 C2.1
  Bottom Layer w5: P8.3 P7.3 P6.3 ; P10.3@105.36,632.5 P10.3 97.86,905.16 217.86,1025.16 v1(217.86,1100) ; v1(947.86,1695) 762.86,1695 ; P3.20 762.86,1855 762.86,1695 ; v1(1613.3,1389.57) 1616.8,1393.07 1616.8,1408.94 2252.86,2045 v1(2497.86,2045) ; v1(1707.43,630.43) 1542.86,795 ; v1@1947.86,1090.71 2598.58,1090.71 2617.86,1110 v1(2617.86,1185) ; v1(2142.86,795) 1542.86,795 ; P4.2 2537.86,55 3417.86,55 3477.86,115 3477.86,650 ; P1.6 P1.5 ; v1(3037.71,649.84) 3477.71,649.84 3477.86,650 ; CON1.3 3290.86,1722.01 3477.86,1535 3477.86,1370 ; v1(3527.86,1375) 3482.86,1375 3477.86,1370 ; 762.86,1695 762.86,1040 P5.7 1392.86,945 1542.86,795 ; 3477.86,650 3477.86,1370
NetBT1_1: BT1.1 U4.14 | length 806.9
  Top Layer w5: U4.14 2442.86,1045 2462.86,1025 2462.86,929.5 2467.88,924.48 v1(2487.88,900.84) ; v1@2527.86,576.46 v1(2532.17,572.15) 2536.48,567.85 2556.16,567.85 2704.32,419.69 BT1.1
  Bottom Layer w5: v1(2487.88,900.84) 2487.88,894.98 2527.86,855 v1@2527.86,576.46
NetC3_1: C3.1 D1.2 L1.1 U.8 | length 404.6
  Top Layer w5: U.8 3577.86,1295.72 3587.14,1305 D1.2 ; C3.1 3692.86,1312.99 D1.2 ; L1.1 3733.55,1166.61 3684.87,1215.3 D1.2
NetC3_2: C3.2 U.1 | length 118.4
  Top Layer w5: U.1 3684.68,1487.24 C3.2
NetC7_2: C7.2 U.4 | length 239.3
  Top Layer w5: C7.2 3353.77,1284.57 3427.86,1358.66 U.4
NetC8_1: C8.1 R5.2 | length 125
  Top Layer w5: C8.1 3412.86,1124.13 3451.09,1085.91 R5.2
NetC8_2: C8.2 C9.2 U.6 | length 243.8
  Top Layer w5: C8.2 3437,1195 C9.2 3477.86,1195.87 U.6
NetC20_2: C20.2 C22.2 | length 244.6
  Top Layer w5: C22.2 C20.2
NetC21_2: C21.2 C23.2 | length 100
  Top Layer w5: C23.2 C21.2
NetD4_1: D4.1 R10.1 | length 83.2
  Top Layer w5: R10.1 D4.1
NetD5_1: D5.1 R11.1 | length 83.2
  Top Layer w5: R11.1 D5.1
NetP1_3: P1.3 R7.1 | length 120
  Top Layer w5: P1.3 R7.1
NetP1_4: P1.4 R8.2 | length 121.4
  Top Layer w5: P1.4 2827.86,1398.39 R8.2
NetR1_1: R1.1 R3.2 U.5 | length 517.8
  Top Layer w5: U.5 3427.86,1265.79 3401.11,1239.04 3316.9,1239.04 3297.86,1220 3297.86,1070 3316.72,1051.15 3338.49,1051.15 R1.1 3400.23,1041.77 3451.09,990.91 R3.2
NetR2_1: R2.1 R4.2 U.3 | length 256.7
  Top Layer w5: R4.2 3353.77,1503.39 3404.48,1554.09 R2.1 3422.65,1576.83 3422.65,1569.43 3477.86,1514.21 U.3
NetR10_2: R10.2 U3.31 | length 344.4
  Top Layer w5: U3.31 646.73,1762.98 722.05,1762.98 724.98,1765.91 R10.2@724.98,1990
NetR11_2: R11.2 U3.32 | length 301
  Top Layer w5: U3.32 623.77,1850.91 673.63,1900.77 673.63,2044.47 714.04,2084.88 722.94,2084.88 722.94,2070.07
OSCIN: C20.1 R9.2 U2.5 Y2.2 | length 828.6
  Top Layer w5: U2.5 1642.39,1227.91 1697.86,1283.38 1697.86,1451.61 1783.45,1537.2 1783.45,1550.65 1909.72,1676.91 1909.72,1683.13 1946.59,1720 1959.87,1720 1958.3,1721.57 C20.1
OSCOUT: C22.1 R9.1 U2.6 Y2.1 | length 770.8
  Top Layer w5: Y2.1@1572,1723.39 C22.1 ; Y2.1@1605.3,1739.63 1661.81,1683.13 1661.81,1547.67 1665.55,1543.93 1671.31,1543.93 1689.48,1525.76 R9.1 1672.86,1503.39 1672.86,1276.77 1622.71,1226.61 U2.6
PA0: P3.5 P5.1 U2.10 | length 2996.8
  Top Layer w5: U2.10 1542.66,1177.64 1542.66,1215.2 1227.86,1530 872.86,1530 P5.1 857.86,1765 1009.86,1917 2309.86,1917 2582.86,2190 P3.5
PA1: P3.6 P5.2 U2.11 | length 3021.9
  Top Layer w5: U2.11@1524.28,1155.54 1524.28,1213.58 1292.86,1445 P5.2 792.86,1510 792.86,1720 1007.86,1935 2242.86,1935 P3.6
PA2: P3.7 P5.3 U2.12 | length 3065.4
  Top Layer w5: U2.12 1504.6,1183.67 1501.45,1186.82 1494.12,1186.82 1335.94,1345 P5.3 767.86,1345 722.86,1390 722.86,1705 966.86,1949 2156.86,1949 P3.7
PA3: P3.8 P5.4 U2.13 | length 2064.9
  Top Layer w5: P5.4 897.86,1285 1279.79,1285 1317.81,1246.99 ; v1(1381.16,1243.75) 1377.92,1246.99 1317.81,1246.99 ; U2.13 1317.81,1246.99
  Bottom Layer w5: v1(1381.16,1243.75) 2291.35,2153.93 2291.35,2183.48 P3.8
PA4: P3.9 U2.14 | length 1782.4
  Top Layer w5: U2.14 1447.83,1097.28 1561.11,1097.28 v1(1564.24,1094.15)
  Bottom Layer w5: v1(1564.24,1094.15) 1563.39,1095 1377.86,1095 1327.86,1145 1327.86,1255 1829.01,1756.15 1829.01,1821.15 P3.9
PA5: P3.10 P5.5 U2.15 | length 2097.6
  Top Layer w5: P5.5 947.86,1235 1262.86,1235 1302.86,1195 ; v1(1244.36,1195) 1302.86,1195 ; U2.15 1445.22,1080.2 1417.66,1080.2 1302.86,1195
  Bottom Layer w5: v1(1244.36,1195) 1777.15,1727.78 1777.15,1869.28 P3.10
PA6: P3.11 U2.16 | length 1906.5
  Top Layer w5: U2.16 1498.65,1059.21 1522.86,1035 v1(1522.86,1025)
  Bottom Layer w5: v1(1522.86,1025) 1215.79,1025 1212.86,1027.93 1212.86,1425 1966.77,2178.9 1986.77,2178.9 P3.11
PA7: P3.12 P5.6 U2.17 | length 2236.6
  Top Layer w5: P5.6 967.86,1155 1187.86,1155 ; v1@1181.36,1065 v1(1184.61,1068.25) 1187.86,1071.5 1187.86,1155 ; U2.17 1408.34,1039.53 1292.86,1155 1187.86,1155
  Bottom Layer w5: v1@1181.36,1071.5 1142.86,1110 1142.86,1460 1862.79,2179.93 1887.79,2179.93 P3.12
PA8: P4.16 P10.2 U2.29 | length 2538.4
  Top Layer w5: P10.2 197.86,530 212.2,515.67 ; 212.42,515.89 1026.97,515.89 1067.86,475 P4.16 ; v1@1067.86,671.5 v1(1067.86,677.21) 1067.86,682.93 1500.79,682.93 1583.34,765.47 U2.29
  Bottom Layer w5: P4.16 v1@1067.86,671.5
PA9: P4.15 U2.30 U3.2 | length 4379
  Top Layer w5: U3.2@113.24,1915 60.79,1915 57.86,1912.07 57.86,1020 242.86,835 ; v1(242.86,795) 242.86,835 ; v1(247.86,542.14) 1122.8,542.14 1167.86,497.07 P4.15 ; U2.30 1603.02,765.16 1487.86,650 427.86,650 242.86,835
  Bottom Layer w5: v1(242.86,795) 245.36,792.5 245.36,544.64 v1(247.86,542.14)
PA10: P4.14 U2.31 U3.1 | length 3495.1
  Top Layer w5: U3.1 46.88,1969.02 37.86,1960 37.86,905 227.86,715 300.71,715 390.71,625 1277.86,625 ; P4.14 1277.86,135 1277.86,625 ; U2.31 1622.71,739.84 1507.86,625 1277.86,625
PA11: P4.13 U2.32 | length 832.4
  Top Layer w5: P4.13 1367.86,445 1642.39,719.53 U2.32
PA12: P4.12 U2.33 | length 801.8
  Top Layer w5: P4.12 1467.86,526.62 1665.36,724.11 1665.36,815.9 1662.08,819.18 U2.33
PA15: P4.11 U2.38 | length 974.9
  Top Layer w5: U2.38 1811.45,921.42 1862.86,870 1862.86,602.18 v1@1873.95,591.09 ; v1(1872.86,590) v1@1875.04,590
  Bottom Layer w5: P4.11 1567.86,285 v1@1867.86,585
PB0: P3.13 U2.18 | length 1742.5
  Top Layer w5: v1(1127.89,1059.98) 1168.02,1019.84 U2.18
  Bottom Layer w5: v1@1127.86,1060.24 1127.86,1520 P3.13
PB1: P3.14 U2.19 | length 1798
  Top Layer w5: v1@1112.86,995 v1(1118.02,1000.16) U2.19
  Bottom Layer w5: v1@1112.86,995 1082.86,1025 1082.86,1575 P3.14
PB3: P4.10 U2.39 | length 1022.8
  Top Layer w5: U2.39 1779.96,940.35 1815.25,940.35 1875.86,879.73 1875.86,722 1948.09,649.77 1948.09,590.23 v1(1942.86,585)
  Bottom Layer w5: P4.10 1667.86,310 v1(1942.86,585)
PB4: P4.9 U2.40 | length 1070.4
  Top Layer w5: U2.40 1817.08,960.79 1888.86,889 1888.86,744 2022.86,610 2022.86,590 v1(2017.86,585)
  Bottom Layer w5: P4.9 1767.86,345 2007.86,585 v1(2017.86,585)
PB5: P4.8 U2.41 | length 1095.9
  Top Layer w5: U2.41 1815.78,980.47 1901.86,894.38 1901.86,766 v1(2087.86,580)
  Bottom Layer w5: P4.8 1867.86,360 v1(2087.86,580)
PB6: P4.7 U2.42 | length 1194.9
  Top Layer w5: U2.42 1830.44,1000.16 1937.86,892.73 1937.86,751.62 2049.48,640 2127.86,640 2163.29,604.57 2163.29,579.57 v1(2167.86,575)
  Bottom Layer w5: P4.7 1967.86,375 v1(2167.86,575)
PB7: P4.6 R12.2 U2.43 U4.15 U5.5 | length 3054.1
  Top Layer w5: U2.43 1853.02,1019.84 1957.86,915 1957.86,750 2007.86,700 2238.89,700 ; R12.2 2246.03,1298.44 2429.42,1298.44 2450.79,1277.07 2450.79,1097.07 ; v1(2242.86,575) 2238.89,578.97 2238.89,700 ; U4.15@2364.87,1100 U4.15@2399.87,1100 ; U4.15 2401.94,1097.07 2450.79,1097.07 ; 2238.89,700 2438.42,700 2708.42,970 U5.5 2728.31,973.16 2796.03,973.16 2817.86,995 2817.86,1094.14 2814.94,1097.07 2450.79,1097.07
  Bottom Layer w5: P4.6 2017.86,175 2017.86,350 v1(2242.86,575)
PB8: P4.5 R13.2 U2.45 U4.16 U5.6 | length 3173.1
  Top Layer w5: U2.45 1930.51,1059.21 ; 1931.01,1059.21 1972.08,1059.21 ; R13.2 2143.77,1316.61 2161.94,1298.44 2161.94,1205.93 v1(2222.86,1145) ; v1(2227.86,850) 2222.86,855 2222.86,1070 ; U4.16 v1(2222.86,1145) ; U5.6 2717.37,1020 2708.77,1011.4 2708.77,1003.62 2430.15,725 2002.86,725 1972.08,755.79 1972.08,1059.21 ; 1972.08,1059.21 1982.86,1070 2222.86,1070 ; 2222.86,1070 v1(2222.86,1145)
  Bottom Layer w5: P4.5 2342.86,300 2342.86,735 v1(2227.86,850)
PB9: P4.4 U2.46 | length 1874.5
  Top Layer w5: v1(1667.86,927.98) 1669.33,1007.92 1740.31,1078.9 U2.46
  Bottom Layer w5: v1(1667.86,927.98) 1672.93,933.05 1689.59,933.05 1696.54,940 2407.86,940 2452.86,895 2452.86,310 P4.4
PB10: P3.15 U2.21 | length 1860.3
  Top Layer w5: v1(1042.86,995) 1077.08,960.79 U2.21
  Bottom Layer w5: v1(1042.86,995) 1042.86,1665 1561.8,2183.93 1591.8,2183.93 P3.15
PB11: P3.16 U2.22 | length 1908.4
  Top Layer w5: v1(972.86,995) 1026.76,941.1 U2.22
  Bottom Layer w5: v1(972.86,995) 972.86,1665 P3.16
PB12: P4.20 P6.2 U2.25 | length 1744.2
  Top Layer w5: v1(672.86,685) 767.86,780 1487.86,780 1504.6,796.73 U2.25
  Bottom Layer w5: P6.2 457.86,127.26 470.36,114.76 657.63,114.76 P4.20 667.86,647.26 672.86,652.26 v1(672.86,685)
PB13: P4.19 P7.2 U2.26 | length 1959.5
  Top Layer w5: P7.2 322.86,210 682.86,210 P4.19 ; v1(767.86,685) 848.53,765.67 1503.53,765.67 1524.28,786.42 U2.26
  Bottom Layer w5: P4.19 v1(767.86,685)
PB14: P4.18 P8.2 U2.27 | length 2303.6
  Top Layer w5: P8.2 187.86,255 187.86,315 222.86,350 642.86,350 P4.18 ; v1(867.86,685) 915.32,732.45 1497.83,741.58 1537.28,781.03 1543.97,821.02 U2.27
  Bottom Layer w5: P4.18 v1(867.86,685)
PB15: P4.17 P9.2 U2.28 | length 2346.9
  Top Layer w5: P9.2 189.97,447.1 189.97,407.9 222.86,375 964.94,375 967.86,372.07 P4.17 ; v1(967.9,682.52) 1000.96,715 1497.86,715 1563.65,780.79 U2.28
  Bottom Layer w5: P4.17 v1(967.9,682.52)
PC13: D3.2 P3.2 U2.2 | length 1946.6
  Top Layer w5: U2.2 1701.45,1228.58 1717.86,1245 2042.86,1245 v1(2045.36,1242.5) 2047.86,1240 D3.2
  Bottom Layer w5: v1@2047.86,1240 2142.86,1335 2142.86,1708.73 2374.13,1940 2647.86,1940 P3.2
PC14: C21.1 P3.3 U2.3 Y1.3 | length 1851.5
  Top Layer w5: U2.3 1681.76,1227.28 1724.48,1270 1892.39,1270 1946.96,1324.57 C21.1@1952.86,1324.57 ; Y1.3@1946.09,1531.31 2002.86,1531.31 ; C21.1 1958.77,1319.57 2002.86,1363.66 2002.86,1531.31 ; v1(2080.14,1527.73) 2076.56,1531.31 2002.86,1531.31
  Bottom Layer w5: v1(2080.14,1527.73) 2080.14,1742.27 2312.35,1974.49 2582.35,1974.49 P3.3
PC15: C23.1 P3.4 U2.4 Y1.1 | length 1765.4
  Top Layer w5: U2.4 1663.38,1177.64 1663.38,1230.52 1752.43,1319.57 1802.86,1319.57 ; C23.1 1802.86,1319.57 ; v1(2012.86,1575) 1905.79,1575 1902.86,1572.07 1902.86,1511.89 1859.48,1468.5 Y1.1 1821.37,1468.5 1802.86,1450 1802.86,1319.57
  Bottom Layer w5: v1(2012.86,1575) 2012.86,1775 2233.82,1995.95 2503.82,1995.95 P3.4
RESET: C14.1 R6.2 SW1.B1 SW1.B2 U2.7 | length 1240.5
  Top Layer w5: SW1.B1 SW1.B2 1373.06,1596.42 R6.2 1383.77,1591.61 1401.94,1573.44 1401.94,1567.93 1404.87,1565 v1(1497.86,1565) ; C14.1 1431.33,1731.34 1503.89,1658.78 1503.89,1578.19 1497.86,1572.17 v1(1497.86,1565) ; U2.7 1603.02,1225.31 1642.86,1265.15 1642.86,1420 v1(1497.86,1565)
SWCLK: P2.2 U2.37 | length 963.1
  Top Layer w5: U2.37 1796.19,901.73 1827.86,870.06 1827.86,500 1912.86,415 2217.86,415 P2.2
SWDIO: P2.3 U2.34 | length 1120.1
  Top Layer w5: U2.34 1681.76,698.9 1577.86,595 1577.86,415 1597.86,395 2141.8,395 2192.86,343.94 P2.3
VBAT: P3.1 U2.1 | length 1967.3
  Top Layer w5: U2.1 1721.13,1173.15 1724.28,1170 v1(1777.86,1170)
  Bottom Layer w5: v1(1777.86,1170) 1809.67,1201.81 2134.67,1201.81 2302.86,1370 2302.86,1790 2392.86,1880 2717.86,1880 2991.8,2153.93 2991.8,2183.93 P3.1
VCC: C4.2 C5.2 C6.2 CON1.1 R2.2 U.2 | length 568.1
  Top Layer w5: CON1.1 3477.86,1699.57 C4.2 C5.2 C6.2 R2.2 3481.25,1560.83 3527.86,1514.21 U.2
VCC3V3: C12.1 C13.2 C15.1 C16.2 C17.2 C18.2 C19.2 D2.1 D3.1 P1.1 P1.2 P2.4 P3.18 P4.1 P5.8 P6.1 P7.1 P8.1 P9.1 P10.1 R6.1 R12.1 R13.1 U1.2 U1.4 U2.9 U2.24 U2.36 U2.48 U3.12 U4.2 U5.8 | length 12225.3
  Top Layer w5: U3.12 72.86,1319.41 70.86,1317.41 70.86,1122 347.86,845 P5.8 1297.43,845 C16.2 1407.43,829.57 1446.53,868.66 U2.24 1607.86,901.73 ; v1(1102.86,1850) 1096.69,1850 1086.69,1840 957.86,1840 892.86,1775 892.86,1700 952.86,1640 1349.48,1640 R6.1 1454.48,1668.39 v1(1477.64,1645.23) ; v1(1462.86,1465) 1542.43,1385.43 1542.43,1233.82 1560.37,1215.88 1560.37,1204.1 1563.65,1200.82 U2.9 1563.65,1129.21 1574.6,1118.27 1731.13,1118.27 ; v1(1782.86,635) 1782.86,715.43 1778.3,720 1778.3,763.86 1721.13,821.02 U2.36 1721.13,882.46 1702.86,900.73 1701.99,901.45 1700.81,901.73 1607.86,901.73 ; C15.1 2222.43,475.91 2307.86,561.34 v1(2307.86,635) ; R12.1 2092.86,1393.39 ; P4.1 2742.86,125 3127.86,510 U1.2 U1.4 3127.86,1117.48 3035.35,1210 C12.1 3046.69,1222.33 3085.19,1222.33 3167.86,1305 3167.86,1341.57 C13.2 3154.44,1349.09 3105.35,1300 3047.51,1300 D2.1@2994.48,1353.03 ; U5.8 2792.86,1120 2992.27,1319.41 2994.48,1348.89 D2.1@2994.48,1353.03 ; P1.1 2927.86,1565 ; 1607.86,901.73 1607.86,995 1731.13,1118.27 ; 1731.13,1118.27 U2.48 1800,1118.27 1803.14,1121.41 1803.14,1121.62 1866.96,1185.43 C18.2 1893.99,1164.31 1930.96,1164.31 2000.27,1095 U4.2 2072.86,1095 2092.86,1115 2092.86,1393.39 ; 2092.86,1393.39 D3.1 2059.44,1404.96 2059.44,1421.58 2152.86,1515 2547.86,1515 2597.86,1565 2927.86,1565 ; 2927.86,1565 P1.2 2927.86,1423.58 2994.48,1356.97 D2.1 D2.1@2994.48,1353.03
  Bottom Layer w5: P9.1 P10.1 ; P9.1@298.35,445.48 257.86,405 45.79,405 42.86,402.07 42.86,120 P8.1 P7.1 P6.1 ; P9.1@298.83,445 386.74,445 ; P9.1@306.74,460 691.74,845 P5.8 ; v1(1102.86,1850) 1297.86,2045 P3.18 ; v1(1462.86,1465) 1470.25,1472.39 1470.25,1637.84 v1(1477.64,1645.23) ; v1(1782.86,635) v1(2307.86,635) 2307.86,556.97 2092.86,341.97 P2.4
pads on no net: U3.3 U3.4 U3.5 U3.6 U3.7 U3.8 U3.9 U3.10 U3.11 U3.14 U3.15 U3.16 U3.17 U3.18 U3.19 U3.20 U3.23 U3.24 U3.25 U3.26 U3.27 U3.28 U3.29 U3.30 U3.33 U3.34 U4.1 U4.3 U4.4 Y1.2 Y1.4

## Polygon pours and split planes (outlines as drawn)
GND on Top Layer "GND_L01_P005" (solid, remove dead copper, pour order 5): -57.14,0 -57.14,2285 42.86,2285 42.86,2010 612.86,2010 612.86,2285 3927.86,2285 3927.86,0
VCC3V3 on Top Layer "NONET_L-01_P-001" (solid, remove dead copper, pour order 4): 3067.86,845 3067.86,1085 3177.86,1085 3187.86,1075 3187.86,850 3077.86,850 3072.86,845 3067.86,850
5V on Top Layer "NONET_L-01_P-001" (solid, remove dead copper, pour order 3): 3612.86,1045 3872.86,1045 3887.86,1030 3887.86,875 3617.86,875 3607.86,885
VCC on Top Layer "NONET_L-01_P-001" (solid, remove dead copper, pour order 2): 3427.86,1770 3552.86,1770 3592.86,1770 3592.86,1560 3447.86,1560
VCC on Top Layer "NONET_L-01_P-001" (solid, remove dead copper, pour order 1): 3272.86,1880 3272.86,1730 3492.86,1730 3492.86,1725 3497.86,1720
GND on Bottom Layer "GND_L02_P006" (solid, remove dead copper, pour order 6): -57.14,0 -57.14,2285 42.86,2285 42.86,2010 612.86,2010 612.86,2285 3927.86,2285 3927.86,0

## Keep-outs
Keep-Out Layer:
  the board outline again, w10

## Silkscreen, mask and mechanical layers (free items; w line width, h text height)
Top Overlay:
  text "5V" at 1407.28,2073.95 h30 r90
  text "PB1" at 1707.49,2067.85 h30 r90
  text "PA1" at 2507.49,2067.85 h30 r90
  text "3V3" at 1307.32,2067.01 h30 r90
  text "PB0" at 1807.32,2066.02 h30 r90
  text "PA7" at 1895.43,2066 h30 r90
  text "PA6" at 2000.09,2066 h30 r90
  text "PA5" at 2107.28,2065.93 h30 r90
  text "PA4" at 2207.45,2066.04 h30 r90
  text "PA3" at 2307.32,2066 h30 r90
  text "PA2" at 2407.49,2066.09 h30 r90
  text "PA0" at 2607.32,2066.02 h30 r90
  text "GND" at 1107.45,2061.33 h30 r90
  text "GND" at 1207.45,2061.33 h30 r90
  text "PB11" at 1507.49,2060.4 h30 r90
  text "PB10" at 1607.32,2058.57 h30 r90
  text "PC15" at 2707.45,2057.74 h30 r90
  text "PC14" at 2807.45,2057.85 h30 r90
  text "PC13" at 2907.45,2057.81 h30 r90
  text "VBAT" at 3007.45,2055.03 h30 r90
  text "BUSY" at 922.86,1520.33 h30
  text "RST" at 917.86,1435.42 h30
  text "DC" at 917.86,1335.42 h30
  text "SPI_CS" at 917.86,1237.91 h30
  text "SPI_SCK" at 917.86,1137.91 h30
  text "SPI_MOSI" at 912.86,1037.91 h30
  text "GND" at 912.86,935.42 h30
  text "3V3" at 917.86,835.54 h30
  text "STOP ALARM" at 367.86,627.77 h30
  text "MENU MODE" at 362.86,442.77 h30
  text "3V3" at 2070.21,260.41 h30
  text "SWDIO" at 2147.86,259.87 h30
  text "SWCLK" at 2242.86,259.87 h30
  text "GND" at 2364.53,260.28 h30
  text "5V" at 2377.28,210.3 h30 r90
  text "3V3" at 2577.32,203.37 h30 r90
  text "PA8" at 1080.09,202.34 h30 r90
  text "PA9" at 1177.32,202.34 h30 r90
  text "PB3" at 1677.32,202.35 h30 r90
  text "PB4" at 1777.45,202.4 h30 r90
  text "PB5" at 1880.09,202.29 h30 r90
  text "PB6" at 1977.32,202.35 h30 r90
  text "PB7" at 2077.45,202.35 h30 r90
  text "PB8" at 2177.32,202.34 h30 r90
  text "PB9" at 2277.32,202.34 h30 r90
  text "GND" at 2477.45,197.69 h30 r90
  text "PA11" at 1377.49,196.76 h30 r90
  text "PB12" at 677.49,195 h30 r90
  text "PB13" at 777.32,194.9 h30 r90
  text "PB14" at 877.49,194.94 h30 r90
  text "PB15" at 977.32,194.83 h30 r90
  text "PA10" at 1277.32,194.93 h30 r90
  text "PA12" at 1477.49,195 h30 r90
  text "PA15" at 1577.32,194.83 h30 r90
  text "UP" at 370.09,165 h30 r90
  text "DOWN" at 565.09,165 h30 r90
  text "ENTER" at 195.43,155 h30 r90

## Text inside footprints (layer, text, board x,y; h text height)
BT1: Mechanical 2 "ZONE FOR ADHESIVE FIXATION" at 3556.68,596.41 h40 r180
P3: Top Overlay "20" at 1002.86,2215 h40 r270; Top Overlay "1" at 3072.86,2175 h40; Top Overlay "10" at 2002.86,2255 h40
P4: Top Overlay "10" at 1692.67,58.07 h40 r180; Top Overlay "1" at 2572.59,58.07 h40 r180; Top Overlay "20" at 692.67,58.07 h40 r180
P5: Top Overlay "1" at 767.86,1540 h40; Top Overlay "8" at 777.86,835 h40 r90